# Altium PCB stesc.PcbDoc
Units mm, origin at the board's own origin, x right, y up, seen from the top; angles counter-clockwise.
Board outline 24 x 32 mm, 6 copper layers (Top Layer, Signal Layer 1, Signal Layer 2, Signal Layer 3, Signal Layer 4, Bottom Layer), stack 1.231 mm thick; 72 components, 56 nets, 239 pads, 107 vias.
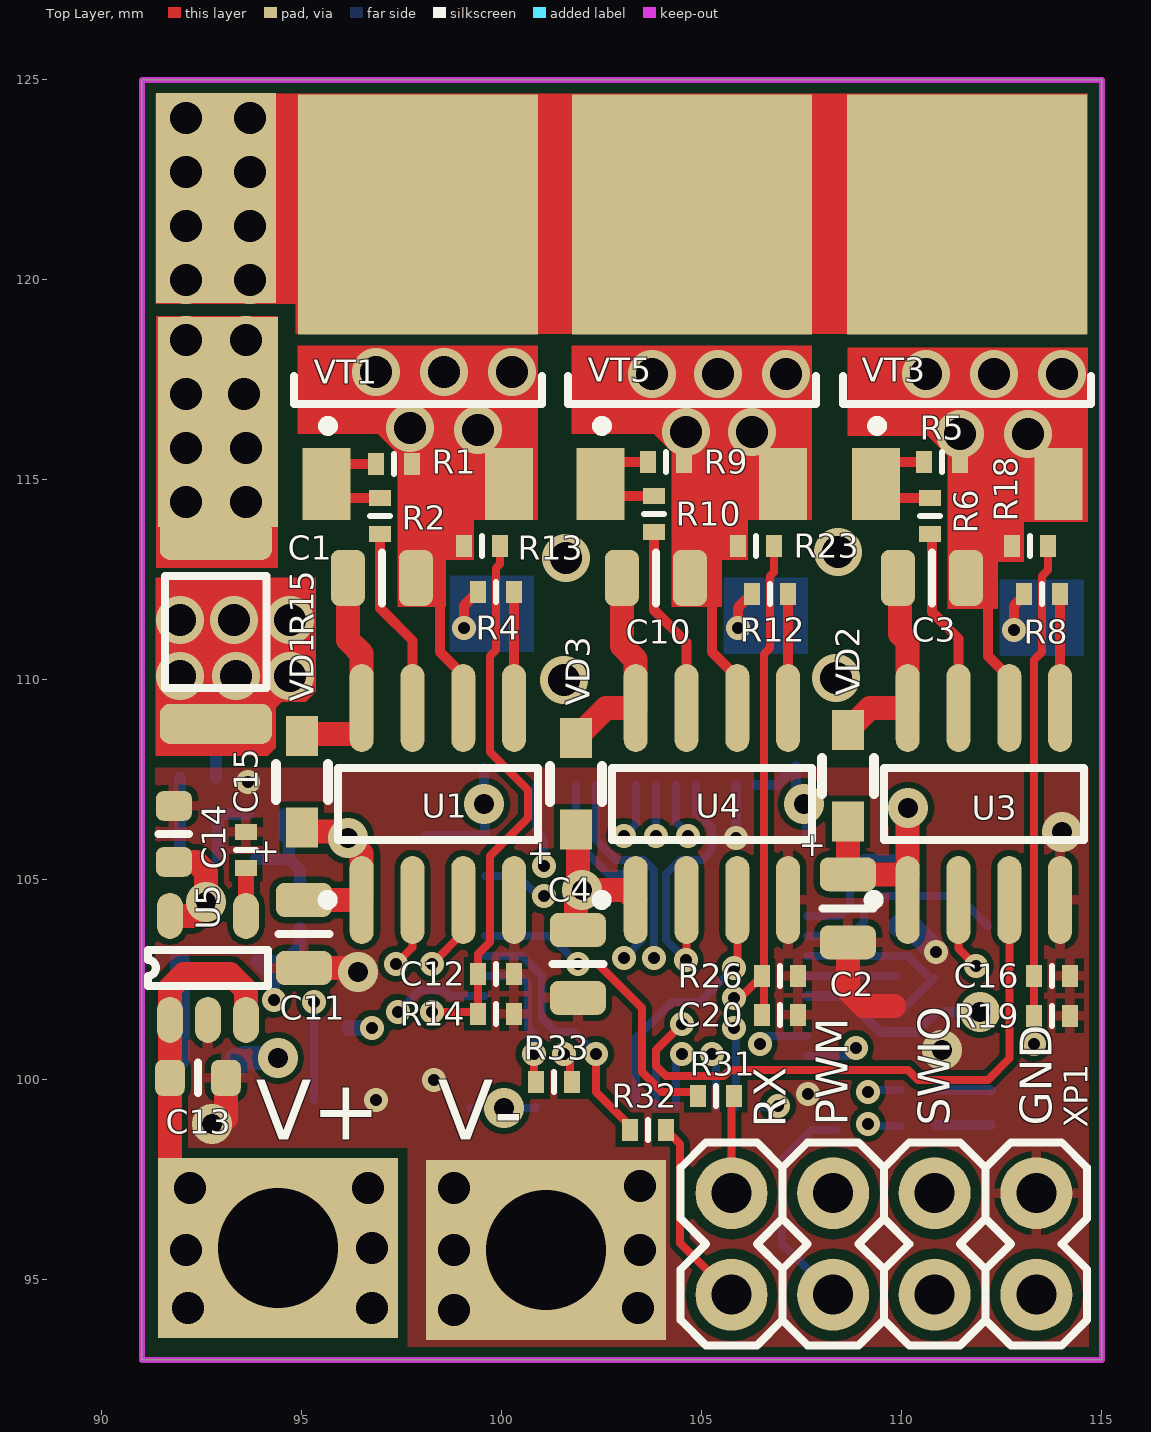
[diagram p0: Top Layer view]
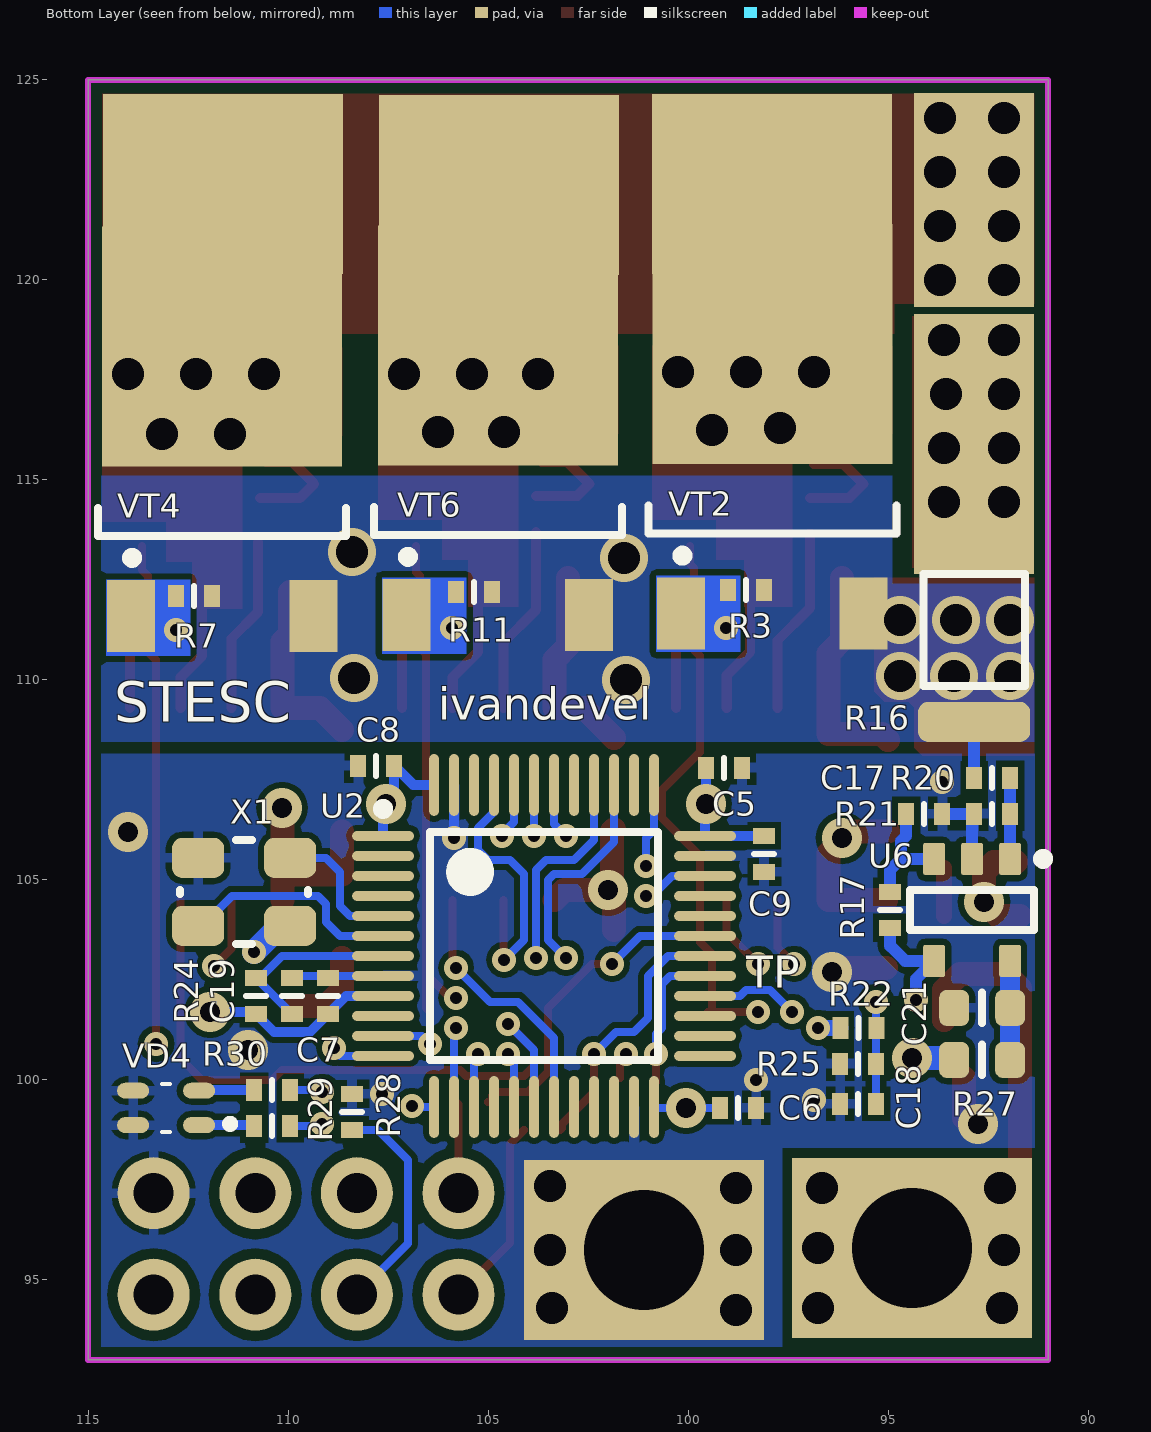
[diagram p1: Bottom Layer view, seen from below]
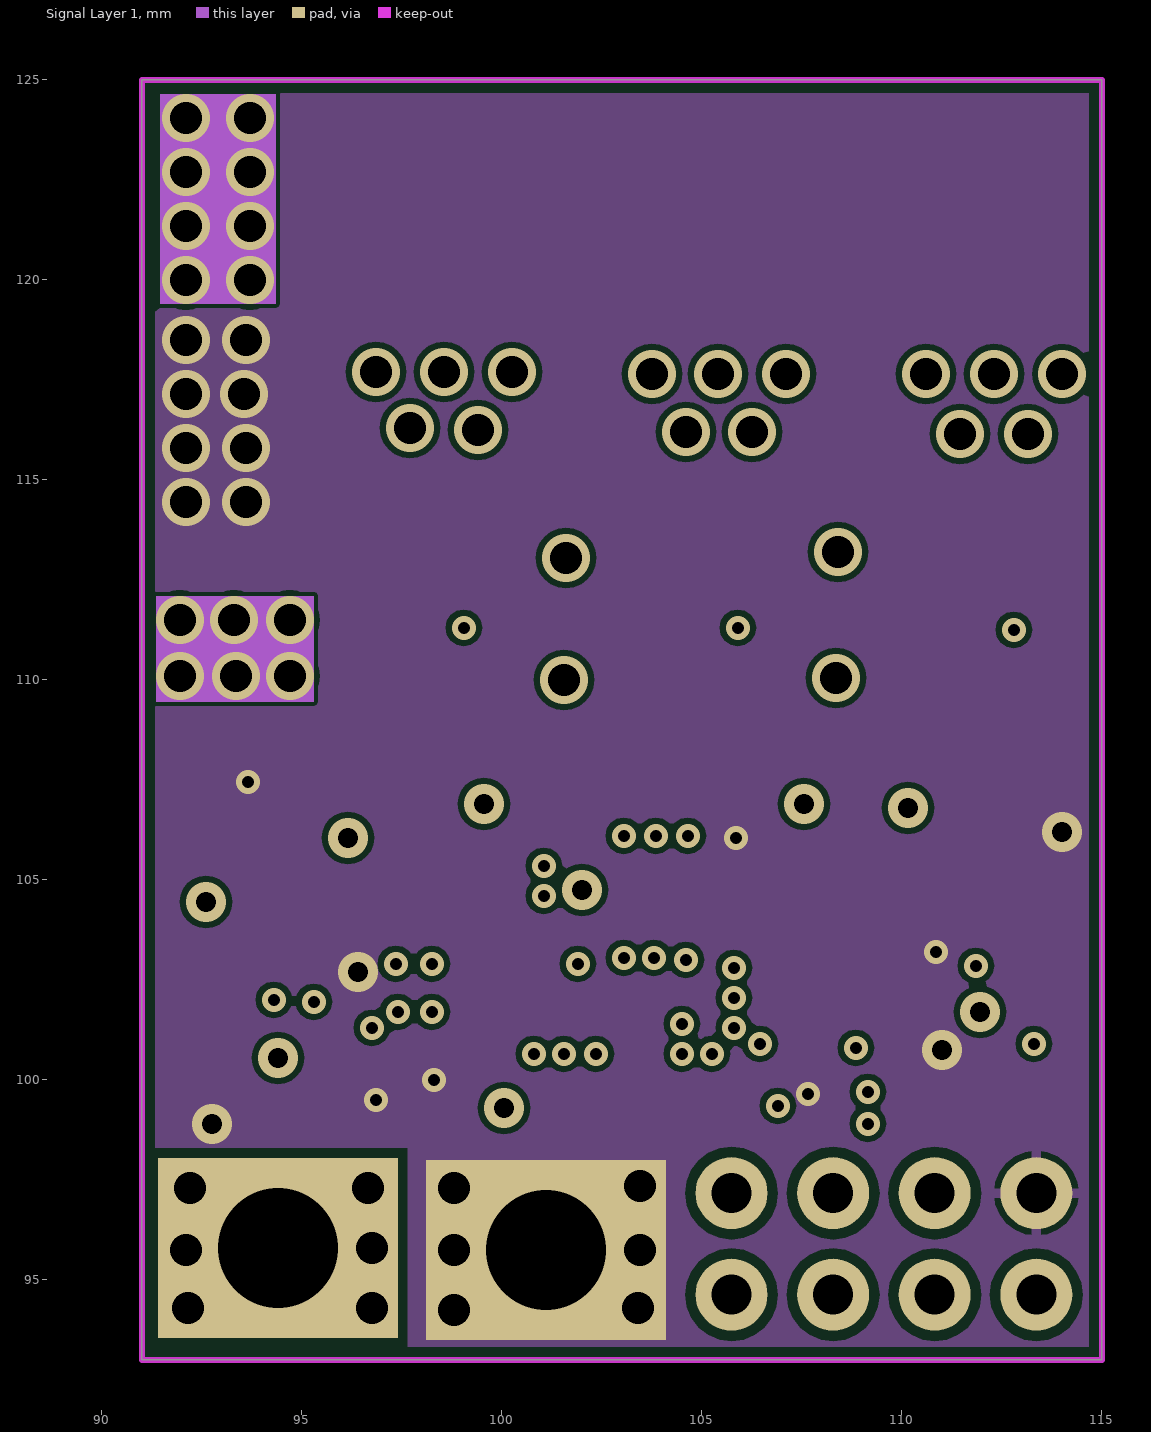
[diagram p2: Signal Layer 1]
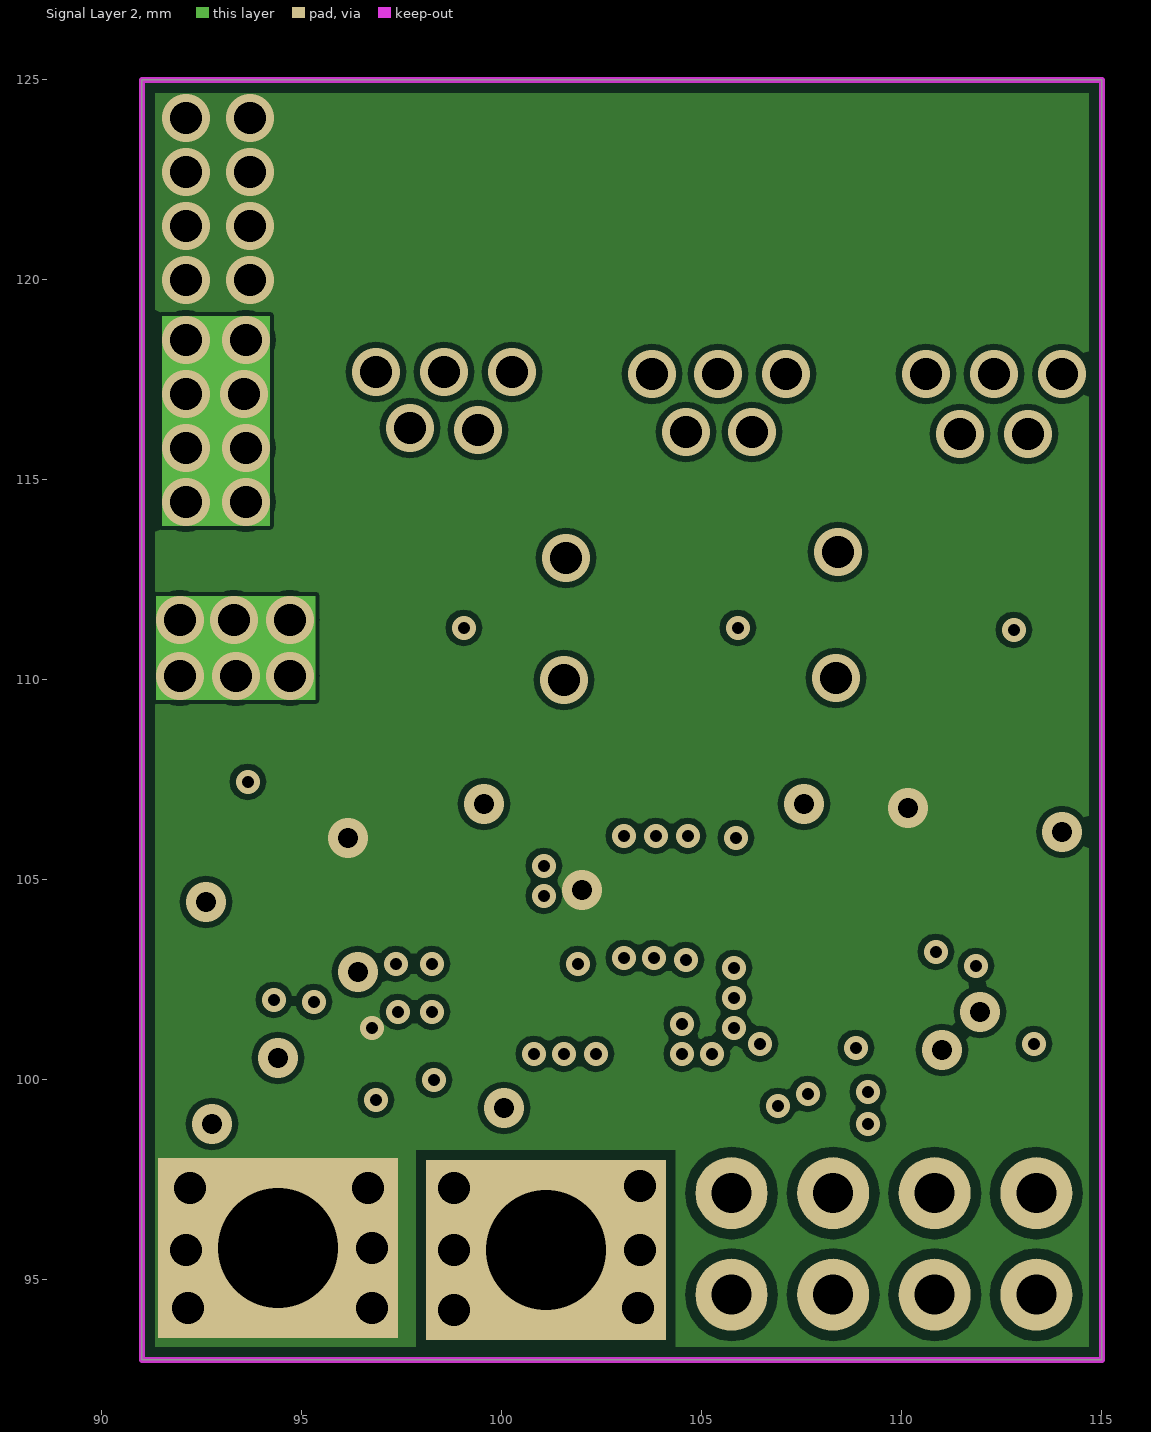
[diagram p3: Signal Layer 2]
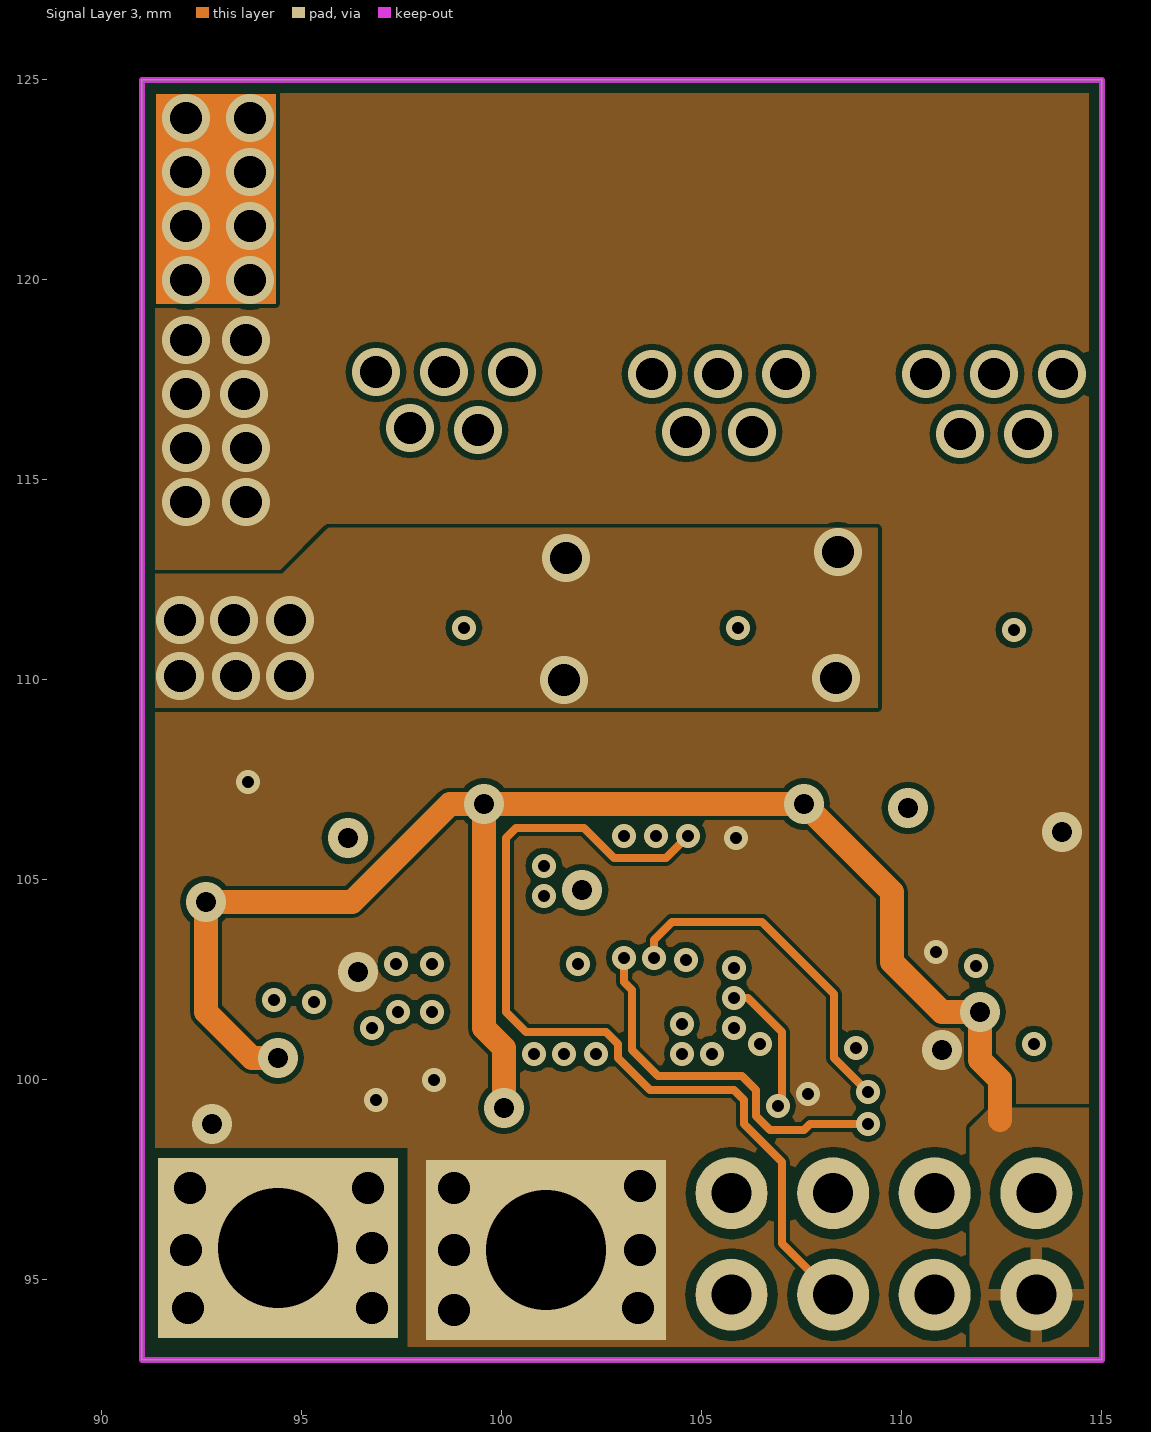
[diagram p4: Signal Layer 3]
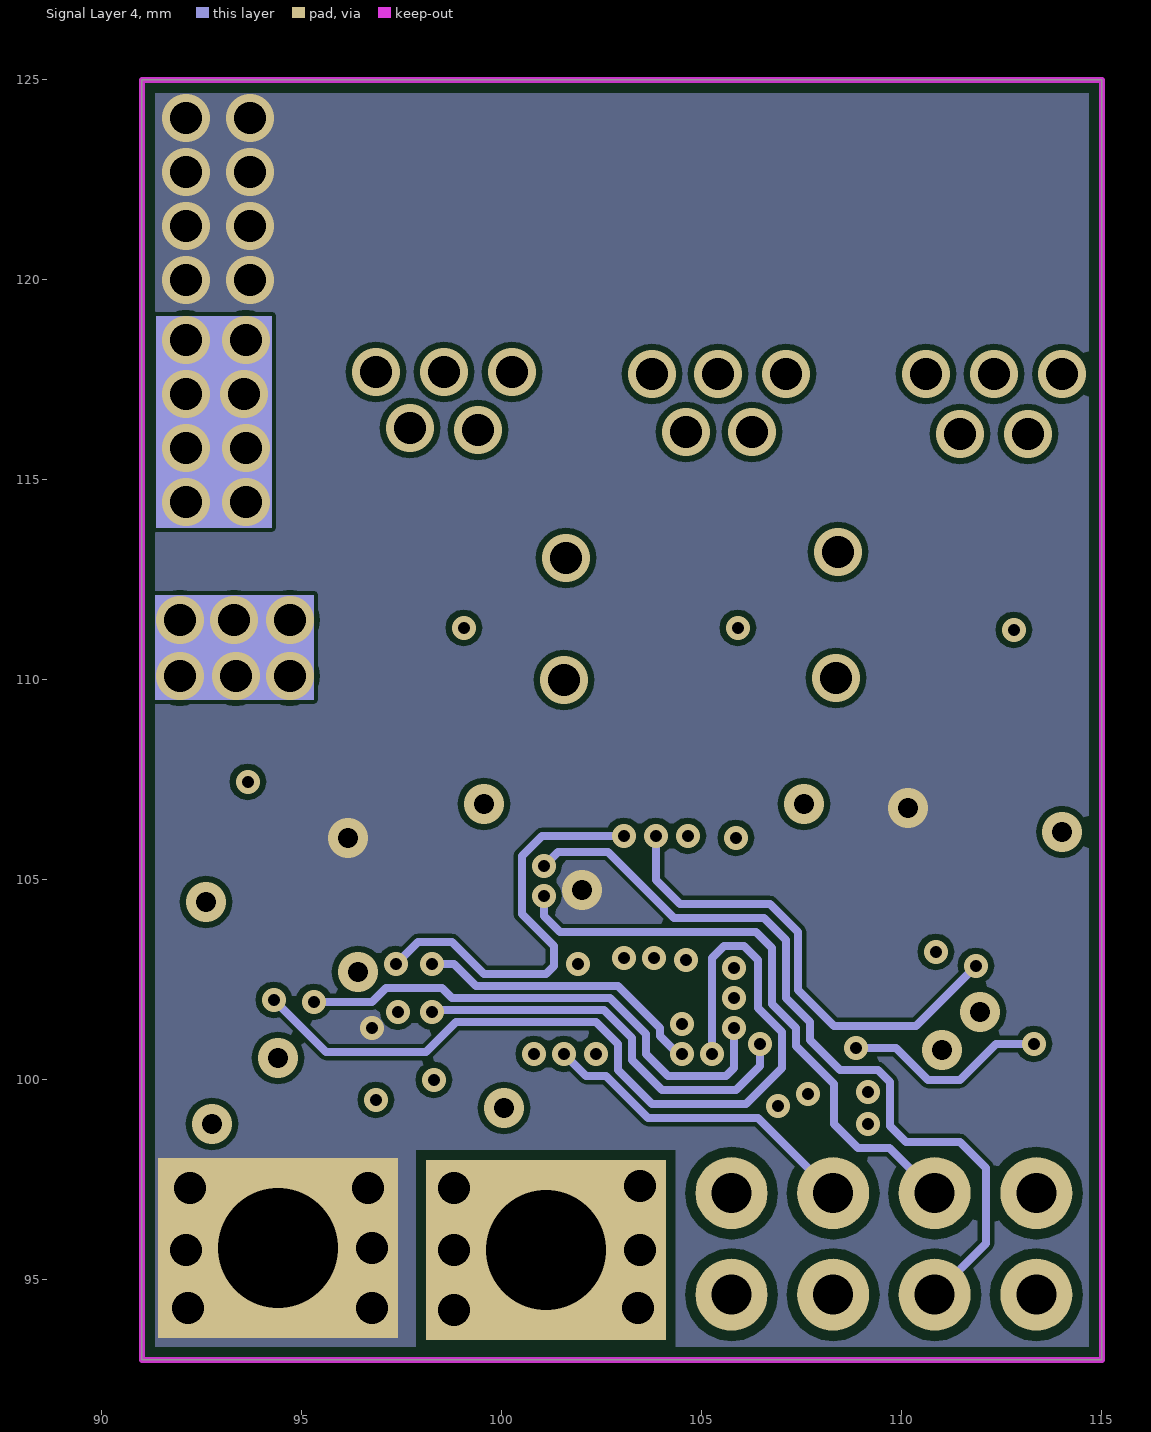
[diagram p5: Signal Layer 4]

## Layer stack, top to bottom
Top Solder: solder mask 0.0102, Solder Resist, Dk 3.5
Top Layer: signal copper 0.0356
Dielectric 1: core 0.254, FR-4, Dk 4.2
Signal Layer 1: signal copper 0.036
Dielectric 3: prepreg 0.127, Dk 4.2
Signal Layer 2: signal copper 0.036
Dielectric 4: core 0.254, Dk 4.2
Signal Layer 3: signal copper 0.036
Dielectric 5: prepreg 0.127, Dk 4.2
Signal Layer 4: signal copper 0.036
Dielectric 2: core 0.254, Dk 4.2
Bottom Layer: signal copper 0.0356
Bottom Solder: solder mask 0.0102, Solder Resist, Dk 3.5

## Board outline
91,93 91,125 115,125 115,93

## Design rules (kind name [scope] priority, off if disabled: settings)
AssemblyTestPointUsage [All] p1 off:
AssemblyTestpoint [All] p1 off: testpointundercomponent=TRUE minsize=1.016 maxsize=2.54 preferedsize=1.524 minholesize=0 maxholesize=1.016 preferedholesize=0.813 testpointgrid=0.025 usegrid=TRUE gridtolerance=0 allowsidetop=TRUE allowsidebottom=TRUE
Clearance Clearance_Holes [IsPadHoleValid] p1: gap=0.25
Clearance Clearance_Border [All vs OnLayer('Keep-Out Layer')] p2: gap=0.25
Clearance Clearance_Poly_Top [InPoly and (OnLayer('Top Layer'))] p3: gap=0.15
Clearance Clearance_Poly_Bottom [InPoly and (OnLayer('Bottom Layer'))] p4: gap=0.15
Clearance Clearance_Via_Via [IsVia vs IsVia] p5: gap=0.15
Clearance Clearance_Top [All vs OnLayer('Top Layer')] p6: gap=0.1
Clearance Clearance_Bot [All vs OnLayer('Bottom Layer')] p7: gap=0.1
Clearance Clearance_Via_Layer1 [IsVia vs OnLayer('Signal Layer 1')] p8: gap=0.15
Clearance Clearance_Via_Layer2 [IsVia vs OnLayer('Signal Layer 2')] p9: gap=0.15
Clearance Clearance_Via_Layer3 [IsVia vs OnLayer('Signal Layer 3')] p10: gap=0.15
Clearance Clearance_Via_Layer4 [IsVia vs OnLayer('Signal Layer 4')] p11: gap=0.15
Clearance Clearance_Via_Layer5 [IsVia vs OnLayer('Signal Layer 5')] p12: gap=0.15
Clearance Clearance_All [All] p13: gap=0.1
ComponentClearance ComponentClearance_LCD1_DD1_DA6 [InComponent('LCD1') vs InComponent('DD1') or InComponent('DA6')] p1: gap=0 collisioncheckmode=3 verticalgap=0 showdistances=FALSE
ComponentClearance ComponentClearance_LCD1_XS1 [InComponent('LCD1') vs InComponent('XS1')] p2: gap=0 collisioncheckmode=3 verticalgap=0 showdistances=FALSE
ComponentClearance ComponentClearance_LCD1 [InComponent('LCD1')] p3: gap=0.2 collisioncheckmode=3 verticalgap=0 showdistances=FALSE
ComponentClearance [All] p4: gap=0.2 collisioncheckmode=3 verticalgap=0.2 showdistances=TRUE
FabricationTestPointUsage [All] p1 off: valid=0 allowmultiple=FALSE
FabricationTestpoint [All] p1 off: side=3 testpointundercomponent=TRUE minsize=1.016 maxsize=2.54 preferedsize=1.524 minholesize=0 maxholesize=1.016 preferedholesize=0.813 testpointgrid=0.025 allowsidetop=TRUE allowsidebottom=TRUE usegrid=TRUE gridtolerance=0
FanoutControl Fanout_BGA [IsBGA] p1 off: bgadir=Out bgaviamode=Centered fanoutstyle=Auto fanoutdirection=Alternating viagrid=0.025 // Fanout_BGA (Default Rule)
FanoutControl Fanout_LCC [IsLCC] p2 off: bgadir=Out bgaviamode=Centered fanoutstyle=Auto fanoutdirection=Alternating viagrid=0.025 // Fanout_LCC (Default Rule)
FanoutControl Fanout_SOIC [IsSOIC] p3 off: bgadir=Out bgaviamode=Centered fanoutstyle=Auto fanoutdirection=Alternating viagrid=0.025 // Fanout_SOIC (Default Rule)
FanoutControl Fanout_Small [(CompPinCount < 5)] p4 off: bgadir=Out bgaviamode=Centered fanoutstyle=Auto fanoutdirection=OutThenIn viagrid=0.025 // Fanout_Small (Default Rule)
FanoutControl Fanout_Default [All] p5 off: bgadir=Out bgaviamode=Centered fanoutstyle=Auto fanoutdirection=Alternating viagrid=0.025 // Fanout_Default (Default Rule)
HoleSize [All] p1: absolutevalues=TRUE maxlimit=5 minlimit=0.2 maxpercent=80.000 minpercent=20.000
MinimumSolderMaskSliver [All] p1 off: minsoldermaskwidth=0.2
NetAntennae [All] p1 off: netantennaetolerance=0
PlaneClearance [All] p1: clearance=0.3
PlaneConnect PlaneConnect_1 [InNet('GND')] p1: planeconnectstyle=Direct reliefexpansion=0.5 reliefentries=4 reliefconductorwidth=0.25 reliefairgap=0.25
PlaneConnect PlaneConnect_Thermopads [(InPadClass('DD4 ThermoPads'))] p2: planeconnectstyle=Direct reliefexpansion=0.508 reliefentries=4 reliefconductorwidth=0.254 reliefairgap=0.254
PlaneConnect PlaneConnect_Via [IsVia] p3: planeconnectstyle=Direct reliefexpansion=0.508 reliefentries=4 reliefconductorwidth=0.254 reliefairgap=0.254
PlaneConnect [All] p4: planeconnectstyle=Relief reliefexpansion=0.3 reliefentries=4 reliefconductorwidth=0.3 reliefairgap=0.3
PolygonConnect PolygonConnect_6 [All vs InNet('VCC')] p1: connectstyle=Direct reliefconductorwidth=0.254 reliefentries=4 polygonreliefangle="90 Angle" airgapwidth=0.254
PolygonConnect PolygonConnect_GND [(InPadClass('GND_CLASS'))] p2: connectstyle=Direct reliefconductorwidth=0.254 reliefentries=4 polygonreliefangle="90 Angle" airgapwidth=0.254
PolygonConnect PolygonConnect_5 [All vs InNet('PGND')] p3: connectstyle=Direct reliefconductorwidth=0.254 reliefentries=4 polygonreliefangle="90 Angle" airgapwidth=0.254
PolygonConnect PolygonConnect_VIA [All vs IsVia] p4: connectstyle=Direct reliefconductorwidth=0.254 reliefentries=4 polygonreliefangle="90 Angle" airgapwidth=0.254
PolygonConnect PolygonConnect_3 [InNet('GND')] p5: connectstyle=Relief reliefconductorwidth=0.25 reliefentries=4 polygonreliefangle="90 Angle" airgapwidth=0.15
PolygonConnect PolygonConnect_4 [InNet('USB_VBUS')] p6: connectstyle=Direct reliefconductorwidth=0.254 reliefentries=4 polygonreliefangle="90 Angle" airgapwidth=0.254
PolygonConnect PolygonConnect_2 [InNet('9V_IN')] p7: connectstyle=Direct reliefconductorwidth=0.254 reliefentries=4 polygonreliefangle="90 Angle" airgapwidth=0.254
PolygonConnect PolygonConnect_1 [InNetClass('ExtraPowerLines')] p8: connectstyle=Direct reliefconductorwidth=0.254 reliefentries=4 polygonreliefangle="90 Angle" airgapwidth=0.254
PolygonConnect PolygonConnect_Thermopads_1 [(InPadClass('DD4 ThermoPads'))] p9: connectstyle=Direct reliefconductorwidth=0.254 reliefentries=4 polygonreliefangle="90 Angle" airgapwidth=0.254
PolygonConnect PolygonConnect_DCPads [InPadClass('DCPads')] p10: connectstyle=Direct reliefconductorwidth=0.254 reliefentries=4 polygonreliefangle="90 Angle" airgapwidth=0.254
PolygonConnect PolygonConnect_DCParts [All vs InComponentClass('DCParts')] p11: connectstyle=Direct reliefconductorwidth=0.254 reliefentries=4 polygonreliefangle="90 Angle" airgapwidth=0.254
PolygonConnect [All] p12: connectstyle=Relief reliefconductorwidth=0.3 reliefentries=4 polygonreliefangle="90 Angle" airgapwidth=0.3
RoutingVias [All] p1: holewidth=0.2 width=0.4 viastyle="Through Hole" minholewidth=0.2 minwidth=0.4 maxholewidth=2 maxwidth=3
SilkToSilkClearance [All] p1 off: silktosilkclearance=0
SilkToSolderMaskClearance SilkscreenOverComponentPads [IsPad] p1: minsilkscreentomaskgap=0.1 clearancetoexposedcopper=TRUE
SolderMaskExpansion [All] p1: expansion=0.102
Width [All] p1: maxlimit=5 minlimit=0.1 preferedwidth=0.2
13 further rules are at their usual default settings.

## Classes and differential pairs
pad class GND_CLASS: Free-33

## Components (designator, comment, footprint, x,y, rotation, side; value= is the part's Value field where it differs from the comment)
C1 "10uF" CAP0805R 97,112.55 r180 top
C2 "10uF" CAP0805R 108.65,104.291 r90 top
C3 "10uF" CAP0805R 110.75,112.55 r180 top
C4 "10uF" CAP0805R 101.9,102.9 r90 top
C5 "100nF" CAP0402R 99.1,107.8 r180 bottom
C6 "100nF" CAP0402R 98.75,99.3 r180 bottom
C7 "100nF" CAP0402R 109,102.1 r90 bottom
C8 "100nF" CAP0402R 107.8,107.85 r0 bottom
C9 "100nF" CAP0402R 98.1,105.65 r270 bottom
C10 "10uF" CAP0805R 103.85,112.55 r180 top
C11 "10uF" CAP0805R 95.05,103.65 r90 top
C12 "1uF" CAP0402R 99.85,102.65 r180 top
C13 "10uF" CAP0603R 92.4,100.05 r180 top
C14 "10uF" CAP0603R 91.8,106.15 r270 top
C15 "100nF" CAP0402R 93.6,105.75 r90 top
C16 "1uF" CAP0402R 113.75,102.6 r180 top
C17 "1uF" CAP0402R 92.4,106.65 r180 bottom
C18 "1uF" CAP0402R 95.75,99.4 r180 bottom
C19 "1uF" CAP0402R 109.9,102.1 r270 bottom
C20 "1uF" CAP0402R 106.95,101.623 r180 top
C21 "10uF" CAP0603R 92.65,101.8 r180 bottom
R1 "10k" RES0402R 97.3,115.4 r180 top
R2 "100" RES0402R 96.95,114.1 r90 top
R3 "10k" RES0402R 98.55,112.25 r0 bottom
R4 "100" RES0402R 99.85,112.2 r180 top
R5 "10k" RES0402R 111,115.45 r180 top
R6 "100" RES0402R 110.7,114.1 r90 top
R7 "10k" RES0402R 112.35,112.1 r0 bottom
R8 "100" RES0402R 113.5,112.15 r180 top
R9 "10k" RES0402R 104.1,115.45 r180 top
R10 "100" RES0402R 103.8,114.15 r90 top
R11 "10k" RES0402R 105.35,112.2 r0 bottom
R12 "100" RES0402R 106.7,112.15 r180 top
R13 "10k" RES0402R 99.5,113.35 r180 top
R14 "1k" RES0402R 99.85,101.65 r180 top
R15 "0R02" RES2010R 92.85,111.2 r270 top
R16 "0R02" RES2010R 92.85,111.25 r270 bottom
R17 "10k" RES0402R 94.95,104.25 r270 bottom
R18 "10k" RES0402R 113.2,113.35 r180 top
R19 "1k" RES0402R 113.75,101.6 r180 top
R20 "1k" RES0402R 92.4,107.55 r180 bottom
R21 "10k" RES0402R 94.1,106.65 r0 bottom
R22 "10k" RES0402R 95.743,101.3 r0 bottom
R23 "10k" RES0402R 106.35,113.35 r180 top
R24 "10k" RES0402R 110.8,102.1 r270 bottom
R25 "1k" RES0402R 95.75,100.4 r180 bottom
R26 "1k" RES0402R 106.95,102.6 r180 top
R27 "56" RES0603R 92.65,100.5 r180 bottom
R28 "10k" RES0402R 108.4,99.2 r270 bottom
R29 "1k" RES0402R 110.4,98.85 r0 bottom
R30 "1k" RES0402R 110.4,99.75 r0 bottom
R31 "1k" RES0402R 105.35,99.6 r180 top
R32 "1k" RES0402R 103.65,98.75 r0 top
R33 "1k" RES0402R 101.3,99.95 r180 top
U1 "IR2301S" SO-8_N 98.4,106.9 r90 top
U2 "STM32F103CBT6" STM-LQFP48_L 103.6,103.35 r180 bottom
U3 "IR2301S" SO-8_N 112.05,106.9 r90 top
U4 "IR2301S" SO-8_N 105.25,106.9 r90 top
U5 "LDS3985M28R" SOT23H15-5 92.65,102.8 r90 top
U6 "LMV321M5" DBV0005A_L 92.9,104.25 r270 bottom
VD1 "BAT20JFILM" SOD323 95,107.45 r90 top
VD2 "BAT20JFILM" SOD323 108.65,107.6 r90 top
VD3 "BAT20JFILM" SOD323 101.85,107.4 r90 top
VD4 "KPTB-1612SURKCGKC" LED1612 113.05,99.3 r0 bottom
VT1 "STD20NF06T4" DPAK 97.9,119.1 r90 top
VT2 "STD20NF06T4" DPAK 97.892,115.857 r90 bottom
VT3 "STD20NF06T4" DPAK 111.63,119.1 r90 top
VT4 "STD20NF06T4" DPAK 111.65,115.8 r90 bottom
VT5 "STD20NF06T4" DPAK 104.75,119.1 r90 top
VT6 "STD20NF06T4" DPAK 104.755,115.825 r90 bottom
X1 "24.0 MHz" 3225 111.1,104.7 r0 bottom
XP1 "PLD" PLD-08 109.55,95.9 r0 top

## Footprints (in the part's own frame and the unit in brackets; to place one, negate y for a bottom-side part, rotate by r counter-clockwise, add the part's x,y. Pads: shape width x height; smd on the part's side, far side on the other; paste and mask are expansions set on the pad)
3225 [mm] "3.2x2.5x0.8mm Crystal"
  rrect50% 1.3x1 smd: 1(-1.15,-0.85) 2(1.15,-0.85) 3(1.15,0.85) 4(-1.15,0.85)
  silkscreen extent -1.6,-1.3 1.6,1.3, body extent -1.61,-1.25 1.61,1.25, height 0.82
CAP0402R [mm] "Capacitor 0402 reflow soldering"
  rect 0.4x0.55 smd: 1(-0.45,0) 2(0.45,0)
  silkscreen extent 0,-0.25 0,0.25, body extent -0.52,-0.27 0.53,0.28, height 0.56
CAP0603R [mm] "capacitor 0603 reflow soldering"
  rrect50% 0.745x0.9 smd: 1(-0.7,0) 2(0.7,0)
  silkscreen extent 0,-0.38 0,0.38, body extent -0.8,-0.4 0.8,0.4, height 0.81
CAP0805R [mm] "capacitor 0805 reflow soldering"
  rrect50% 0.85x1.4 smd: 1(-0.85,0) 2(0.85,0)
  silkscreen extent 0,-0.64 0,0.64, body extent -1,-0.62 1,0.63, height 0.61
DBV0005A_L [mm] "SOT23, 5-Leads, Body 3.05x1.75mm, Pitch 0.95mm, IPC High Density"
  rrect18% 0.8x0.55 smd: 1(-1.275,0.95) 2(-1.275,0) 3(-1.275,-0.95) 4(1.275,-0.95) 5(1.275,0.95)
  silkscreen extent -1.4,-1.55 0.5,1.9, body extent -1.42,-1.46 1.42,1.46, height 1.08
DPAK [mm] "D-PAK, 4-Leads, Body 6.1x6mm, Pitch 2.28mm, Lead Span 9.7mm, IPC High Density"
  rect 1.8x1.2 smd: 1(-4.2,2.28) 2(-4.2,-2.28)
  rect 6x6 smd: 3(2.54,0)
  silkscreen extent -2.87,-3.1 -1.5,3.1, body extent -4.55,-3.28 5.15,3.3, height 2.32
LED1612 [mm]
  oval 0.8x0.4 smd: A1(-0.825,0.43) A2(-0.825,-0.43) K1(0.825,0.43) K2(0.825,-0.43)
  silkscreen extent -1.7,-0.6 0.1,0.6, body extent -0.8,-0.65 0.8,0.65, height 0.65
PLD-08 [mm]
  round 1.8 hole 1: 1(-3.81,-1.27) 2(-3.81,1.27) 3(-1.27,-1.27) 4(-1.27,1.27) 5(1.27,-1.27) 6(1.27,1.27) 7(3.81,-1.27) 8(3.81,1.27)
  silkscreen extent -5.08,-2.54 5.08,2.54, body extent -5.08,-2.54 5.08,2.54, height 8.45
RES0402R [mm] "resistor 0402 reflow soldering"
  rect 0.4x0.55 smd: 1(-0.45,0) 2(0.45,0)
  silkscreen extent 0,-0.25 0,0.25, body extent -0.5,-0.25 0.5,0.25, height 0.36
RES0603R [mm] "resistor 0603 reflow soldering"
  rrect50% 0.75x0.9 smd: 1(-0.7,0) 2(0.7,0)
  silkscreen extent 0,-0.38 0,0.38, body extent -0.8,-0.4 0.8,0.4, height 0.46
RES2010R [mm] "resistor 2010 reflow soldering"
  rrect50% 1x2.8 smd: 1(-2.3,0) 2(2.3,0)
  silkscreen extent -1.4,-1.27 1.4,1.27, body extent -2.5,-1.25 2.5,1.25, height 0.61
SO-8_N [mm]
  oval 2.2x0.6 smd: 1(-2.4,1.905) 2(-2.4,0.635) 3(-2.4,-0.635) 4(-2.4,-1.905) 5(2.4,-1.905) 6(2.4,-0.635) 7(2.4,0.635) 8(2.4,1.905)
  silkscreen extent -2.52,-2.5 0.9,2.88, body extent -1.95,-2.45 1.95,2.45, height 1.75
SOD323 [mm]
  rect 1x0.8 smd: A(-1.143,0) K(1.143,0)
  silkscreen extent -0.45,-0.65 0.45,0.65, body extent -1.35,-0.67 1.35,0.68, height 1.1
SOT23H15-5 [mm] "SOT23, 5-Leads, Body 2.9x1.6mm, Pitch 0.95mm, Lead Span 2.8mm, IPC High Density"
  oval 1.15x0.65 smd mask+0.1: 1(-1.3,0.95) 2(-1.3,0) 3(-1.3,-0.95) 4(1.3,-0.95) 5(1.3,0.95)
  silkscreen extent -0.45,-1.5 0.45,1.5, body extent -1.5,-1.5 1.5,1.5, height 1.3
STM-LQFP48_L [mm] "QFP, 48-Leads, Body 7x7mm, Pitch 0.5mm, IPC High Density"
  oval 1.55x0.25 smd: 1(-4.025,2.75) 2(-4.025,2.25) 3(-4.025,1.75) 4(-4.025,1.25) 5(-4.025,0.75) 6(-4.025,0.25) 7(-4.025,-0.25) 8(-4.025,-0.75) 9(-4.025,-1.25) 10(-4.025,-1.75) 11(-4.025,-2.25) 12(-4.025,-2.75) 25(4.025,-2.75) 26(4.025,-2.25) 27(4.025,-1.75) 28(4.025,-1.25) 29(4.025,-0.75) 30(4.025,-0.25) 31(4.025,0.25) 32(4.025,0.75) 33(4.025,1.25) 34(4.025,1.75) 35(4.025,2.25) 36(4.025,2.75)
  oval 0.25x1.55 smd: 13(-2.75,-4.025) 14(-2.25,-4.025) 15(-1.75,-4.025) 16(-1.25,-4.025) 17(-0.75,-4.025) 18(-0.25,-4.025) 19(0.25,-4.025) 20(0.75,-4.025) 21(1.25,-4.025) 22(1.75,-4.025) 23(2.25,-4.025) 24(2.75,-4.025) 37(2.75,4.025) 38(2.25,4.025) 39(1.75,4.025) 40(1.25,4.025) 41(0.75,4.025) 42(0.25,4.025) 43(-0.25,4.025) 44(-0.75,4.025) 45(-1.25,4.025) 46(-1.75,4.025) 47(-2.25,4.025) 48(-2.75,4.025)
  silkscreen extent -4.15,-2.85 2.85,3.55, body extent -3.5,-3.5 3.5,3.5, height 1.6

## Part data
C1 C2 C3 C4 C10 C11: library part CC0805_10UF_25V_10%_X5R
C5 C6 C7 C8 C9 C15: library part CC0402_100NF_16V_10%_X5R
C12 C16 C17 C18 C19 C20: library part CC0402_1UF_16V_10%_X5R
C13 C14 C21: library part CC0603_10UF_6.3V_20%_X5R
R1 R3 R5 R7 R9 R11 R13 R17 R18 R21 R22 R23 R24 R28: library part R0402_10K_1%_0.0625W_100PPM
R2 R4 R6 R8 R10 R12: library part R0402_100R_1%_0.1W_100PPM_50V
R14 R19 R20 R25 R26 R29 R30 R31 R32 R33: library part R0402_1K_1%_0.0625W_100PPM
R15 R16: library part R2010_0R02_1%_1W_100PPM
R27: library part R0603_56R_1%_0.1W_100PPM
U1 U3 U4: library part IR2101S, "High and Low Side Driver"
U2: library part CMP-0237-00250-3, "ARM Cortex-M3 32-bit MCU, 128 KB Flash, 20 KB Internal RAM, 37 I/Os, 48-pin LQFP, -40 to 85 degC, Tray"
U5: library part C014S0053T0000000090L0000000090
U6: library part CMP-0055-01022-3, "General Purpose, Low Voltage, Rail-to-Rail Output Operational Amplifiers, 5-pin SOT-23"
VD1 VD2 VD3: library part C004S0020T0000000030L0000000030
VD4: library part C004S0020T0000000027L0000000027
VT1 VT2 VT3 VT4 VT5 VT6: "N-Channel Enhancement Mode FET"
X1: library part C012S0075T0000000004L0000000004, "http://geyer-electronic.de/uploads/tx_userartikelfrequenz/GEYER-KX-7_01.pdf"
XP1: library part PLD-08

## Free pads (board coordinates)
  rect 6x4.5 smd far side: 0(97.9,122.4) 0(104.725,122.375) 0(111.625,122.4)
  rect 6x4.5 hole 3: 3(94.4,95.8) 33(101.1,95.75)
  rect 3x6.5 smd far side: 4(92.85,115.9)
  rect 3x5.35 smd far side: 4(92.85,122)
  rect 3x5.25 smd: 4(92.85,122.05) 4(92.9,116.45)

## Via types
v1: diameter 1.2, hole 0.8, Top Layer to Bottom Layer, tented both sides, 41 vias
v2: diameter 0.6, hole 0.3, Top Layer to Bottom Layer, tented both sides, 40 vias
v3: diameter 1, hole 0.5, Top Layer to Bottom Layer, tented both sides, 13 vias
v4: diameter 1.2, hole 0.8, Top Layer to Bottom Layer, 12 vias
v5: diameter 0.6, hole 0.3, Top Layer to Bottom Layer, 1 vias

## Nets (pads, with @x,y where several pads share a name; then routed paths per layer and width w, separated by ;. In a path a pad name is that pad's centre, name@x,y a point inside that pad or via, vN(x,y) a via of type N, cw(c..) or ccw(c..) an arc to the next point about the centre after c; other vN are vias at no path point)
A_H: U1.2 U2.42 | length 13.6
  Top Layer w0.2: v2(97.35,102.9) 97.765,103.315 U1.2
  Signal Layer 4 w0.2: v2(97.35,102.9) 97.9,103.45 98.75,103.45 99.55,102.65 101.1,102.65 101.3,102.85 101.3,103.35 100.5,104.15 100.5,105.6 101,106.1 v2(103.05,106.1)
  Bottom Layer w0.2: v2(103.05,106.1) 103.35,106.4 U2.42
A_L: U1.3 U2.17 | length 10.7
  Top Layer w0.2: v2(98.25,102.9) 99.035,103.685 U1.3
  Signal Layer 4 w0.2: v2(98.25,102.9) 98.8,102.9 99.35,102.35 102.9,102.35 103.95,101.3 103.95,101.1 104.4,100.65 v2(104.5,100.65)
  Bottom Layer w0.2: U2.17 104.35,100.6 104.4,100.65 v2(104.5,100.65)
AD_CURR: R17.2 U2.15 U6.4 | length 26.1
  Signal Layer 4 w0.2: v2(94.3,102) 95.6,100.7 98.1,100.7 98.85,101.45 102.35,101.45 102.9,100.9 102.9,100.25 103.75,99.4 106.1,99.4 107,100.3 107,101.2 106.4,101.8 106.4,103 106.05,103.35 105.55,103.35 105.25,103.05 v2(105.25,100.65)
  Bottom Layer w0.2: v2(105.25,100.65) 105.35,100.55 U2.15
  Bottom Layer w0.3: v2@94.3,102.1 94.3,102.525 U6.4 94.575,102.975 94.95,103.35 R17.2
AD_MA: C12.2 R13.1 R14.2 U2.11 | length 25.5
  Top Layer w0.2: v2(98.25,101.7) R14.2@99.4,101.7 ; R14.2 R14.2@99.4,101.7 ; R14.2@99.45,101.65 R14.2@99.45,101.7 ; R14.2@99.5,101.7 R14.2@99.45,101.7 ; R13.1 99.95,112.9 99.85,112.8 99.85,110.75 99.7,110.6 99.7,108.2 100.65,107.25 100.65,106.55 99.7,105.6 99.7,103.45 99.4,103.15 R14.2@99.4,101.7 ; R14.2@99.4,101.7 R14.2@99.45,101.7
  Signal Layer 4 w0.2: v2(98.25,101.7) 98.3,101.75 102.55,101.75 103.25,101.05 103.25,100.5 104,99.75 105.85,99.75 106.45,100.35 v2(106.45,100.9)
  Bottom Layer w0.2: v2@106.45,101 v2(106.45,100.9) 106.65,101.1 U2.11
AD_MB: C16.2 R18.1 R19.2 U2.12 | length 19.1
  Top Layer w0.2: v2(113.3,100.9) R19.2 C16.2 113.3,110.5 113.5,110.7 113.5,112.6 113.65,112.75 R18.1
  Signal Layer 4 w0.2: v2(108.85,100.8) 109.85,100.8 110.65,100 111.45,100 112.35,100.9 v2(113.3,100.9)
  Bottom Layer w0.2: U2.12 108.7,100.6 108.85,100.75 v2(108.85,100.8)
AD_MC: C20.2 R23.1 R26.2 U2.13 | length 17
  Top Layer w0.2: v2@105.7,101.95 v2(105.8,102.05) 105.85,102.05 105.9,102.1 105.95,102.05 R26.2 ; C20.2@106.5,101.75 106.55,101.8 106.55,110.65 106.7,110.8 106.7,112.6 106.8,112.7 R23.1
  Signal Layer 3 w0.2: v2(105.8,102.05) 106.15,102.05 107,101.2 107,99.45 v2(106.9,99.35)
  Bottom Layer w0.2: U2.13 106.975,99.325 106.95,99.35 v2(106.9,99.35)
B_H: U2.43 U3.2 | length 15.2
  Top Layer w0.2: U3.2 111.415,103.285 v2(111.85,102.85)
  Signal Layer 4 w0.2: v2(103.85,106.1) 103.85,105 104.45,104.4 106.7,104.4 107.4,103.7 107.4,102.25 108.3,101.35 110.35,101.35 v2(111.85,102.85)
  Bottom Layer w0.2: v2(103.85,106.1) U2.43
B_L: U2.18 U3.3 | length 17
  Top Layer w0.2: v2(104.5,101.4) 103.85,100.75 103.85,100.35 104.1,100.1 105.55,100.1 105.7,100.25 110.15,100.25 110.4,100 112.15,100 112.685,100.535 U3.3
  Bottom Layer w0.2: U2.18 103.85,100.75 v2(104.5,101.4)
BOOT0: R28.2 U2.44 XP1.3 | length 29.4
  Signal Layer 3 w0.2: v2(104.65,106.1) 104.1,105.55 102.8,105.55 102.05,106.3 100.35,106.3 100.1,106.05 100.1,101.7 100.6,101.2 102.6,101.2 102.9,100.9 102.9,100.55 103.7,99.75 105.8,99.75 106.05,99.5 106.05,98.9 107,97.95 107,95.91 XP1.3
  Bottom Layer w0.2: U2.44 104.35,106.45 104.65,106.15 v2(104.65,106.1) ; XP1.3 107,95.91 107,98 107.75,98.75 R28.2@108.35,98.75
C_H: U2.45 U4.2 | length 7.1
  Top Layer w0.2: v2(104.6,103) 104.6,102.98 104.615,102.965 U4.2
  Bottom Layer w0.2: v2(104.6,103) 104.1,103.5 104.1,105.15 104.45,105.5 105,105.5 105.25,105.75 105.25,106.3 104.85,106.7 U2.45
C_L: U2.19 U4.3 | length 6.8
  Top Layer w0.2: v2(105.8,102.8) 105.8,102.85 105.75,102.8 105.7,102.85 105.885,103.035 U4.3
  Bottom Layer w0.2: U2.19 103.35,101.05 104.25,101.95 104.95,101.95 v2(105.8,102.8)
CAN_RX: U2.32
CAN_TX: U2.33
ERR_LED: R30.1 U2.40 | length 15.1
  Signal Layer 3 w0.2: v2(103.8,103.05) 103.8,103.5 104.25,103.95 106.5,103.95 108.3,102.15 108.3,100.55 v2(109.15,99.7)
  Bottom Layer w0.2: U2.40 102.35,106 102.85,105.5 103.55,105.5 103.8,105.25 v2(103.8,103.05) ; v2(109.15,99.7) 109.15,99.5 109.4,99.75 R30.1
GND: C2.1 C4.1 C5.2 C6.2 C7.2 C8.2 C9.2 C11.1 C12.1 C13.1 C14.1 C15.2 C16.1 C17.1 C18.1 C19.1 C20.1 C21.1 pad.4@92.9,116.45 pad.4@92.85,115.9 pad.33 R14.1 R15.1 R16.1 R19.1 R21.1 R25.1 R26.1 R28.1 U1.4 U2.8 U2.23 U2.35 U2.47 U3.4 U4.4 U5.2 U6.2 VD4.K1 VD4.K2 X1.2 X1.4 XP1.8 | length 11.7
  Top Layer w0.6: v3(92.75,98.9) 92.95,98.9 93.1,99.05 C13.1 ; C11.1 96.4,102.8 v3(96.4,102.7) ; C2.1@108.65,103.05 108.65,102.25 109.05,101.85 109.8,101.85 ; v3@110.9,100.75 v3(111,100.75)
  Bottom Layer w0.2: U2.8 C19.1@109.85,102.6
  Bottom Layer w0.25: v2(105.85,106.05) U2.47
  Bottom Layer w0.3: U6.2 92.9,106.65 R21.1
  Bottom Layer w0.6: X1.4 110.2,103.85 v2(110.85,103.2)
  other v1: 92.1,114.45 93.6,114.45 92.1,115.8 93.6,115.8 92.1,117.15 93.55,117.15 92.1,118.5 93.6,118.5
  other v2: 96.85,99.5 107.65,99.65 98.3,100 93.65,107.45
  other v3: 114,106.2
  other v4: 98.8,94.25 103.4,94.3 98.8,95.75 103.45,95.75 98.8,97.3 103.45,97.35
MA: C1.1 pad.0@97.9,122.4 R1.1 R13.2 U1.6 VT1.2 VT2.3 | length 3.7
  Top Layer w0.254: C1.1 98.45,111.95 98.45,110.7 99.035,110.115 U1.6
  other v1: 99.4,116.25 97.7,116.3 96.85,117.7 98.55,117.7 100.25,117.7
MB: C3.1 pad.0@111.625,122.4 R5.1 R18.2 U3.6 VT3.2 VT4.3 | length 2.8
  Top Layer w0.254: 112.15,111.85 112.15,110.6 112.685,110.065 U3.6
  other v1: 111.45,116.15 113.15,116.15 110.6,117.65 112.3,117.65 114,117.65
MC: C10.1 pad.0@104.725,122.375 R9.1 R23.2 U4.6 VT5.2 VT6.3 | length 3.7
  Top Layer w0.254: C10.1 105.25,112 105.25,110.7 105.885,110.065 U4.6
  other v1: 104.6,116.2 106.25,116.2 103.75,117.65 105.4,117.65 107.1,117.65
NetC1_2: C1.2 U1.8 VD1.K | length 5.6
  Top Layer w0.6: VD1.K@95,108.493 95.157,108.65 96.49,108.65 96.495,108.645 U1.8 96.495,110.655 96.15,111 C1.2
NetC3_2: C3.2 U3.8 VD2.K | length 4.7
  Top Layer w0.6: VD2.K 109.207,109.3 U3.8 110.145,110.955 109.95,111.15 C3.2@109.95,112.2
NetC10_2: C10.2 U4.8 VD3.K | length 5.2
  Top Layer w0.6: VD3.K 102.607,109.3 U4.8 103.345,110.505 103,110.85 C10.2
NetC15_1: C15.1 U5.4 | length 1.2
  Top Layer w0.4: U5.4 C15.1
NetC17_2: C17.2 R20.2 U6.1 | length 2
  Bottom Layer w0.3: U6.1 R20.2
NetC21_2: C21.2 R27.2 U6.5 | length 2.5
  Bottom Layer w0.5: R27.2 C21.2 U6.5
NetR1_2: R1.2 R2.2 VT1.1 | length 2.9
  Top Layer w0.254: R1.2 96.12,115.4 VT1.1 95.97,114.55 R2.2
NetR2_1: R2.1 U1.7 | length 4.7
  Top Layer w0.254: R2.1 96.95,111.8 97.765,110.985 U1.7
NetR3_2: R3.2 R4.2 VT2.1 | length 1
  Top Layer w0.254: v2(99.05,111.3) 99.05,111.85 R4.2
NetR4_1: R4.1 U1.5 | length 2.9
  Top Layer w0.254: R4.1 100.3,109.305 U1.5
NetR5_2: R5.2 R6.2 VT3.1 | length 2.9
  Top Layer w0.254: R5.2 109.9,115.45 VT3.1 109.7,114.55 R6.2
NetR6_1: R6.1 U3.7 | length 4.4
  Top Layer w0.254: R6.1@110.75,113.45 110.75,111.7 111.415,111.035 U3.7
NetR7_2: R7.2 R8.2 VT4.1 | length 1
  Top Layer w0.254: v2(112.8,111.25) 112.8,111.85 113.05,112.1 R8.2
NetR8_1: R8.1 U3.5 | length 2.9
  Top Layer w0.254: R8.1 113.955,112.145 U3.5
NetR9_2: R9.2 R10.2 VT5.1 | length 2.9
  Top Layer w0.254: R9.2 103.02,115.45 VT5.1 102.77,114.6 R10.2
NetR10_1: R10.1 U4.7 | length 4.7
  Top Layer w0.254: R10.1 103.8,111.75 104.615,110.935 U4.7
NetR11_2: R11.2 R12.2 VT6.1 | length 1
  Top Layer w0.254: v2(105.9,111.3) 105.9,111.8 R12.2
NetR12_1: R12.1 U4.5 | length 2.9
  Top Layer w0.254: R12.1 107.15,109.305 U4.5
NetR17_1: R17.1 R21.2 U6.3 | length 2.9
  Bottom Layer w0.3: U6.3 94.675,105.525 ; R21.2 94.55,106.1 94.675,105.975 94.675,105.525 ; R17.1 94.95,105.25 94.675,105.525
NetR29_2: R29.2 VD4.A1 | length 1.4
  Bottom Layer w0.25: R29.2 110.87,98.87 VD4.A1
NetR30_2: R30.2 VD4.A2 | length 1.4
  Bottom Layer w0.25: R30.2 112.205,99.75 VD4.A2
NetR31_1: R31.1 XP1.2 | length 2.3
  Top Layer w0.2: XP1.2 105.74,99.39 R31.1@105.8,99.45
NetR32_2: R32.2 XP1.1 | length 4.8
  Top Layer w0.2: R32.2 104.45,98.4 104.45,95.92 XP1.1
NetR33_1: R33.1 XP1.4 | length 8.9
  Top Layer w0.2: v2(101.55,100.65) 101.7,100.65 R33.1@101.7,100.05
  Signal Layer 4 w0.2: v2(101.55,100.65) 102.1,100.1 102.6,100.1 103.65,99.05 106.4,99.05 XP1.4
NRST: C19.2 R24.1 U2.7 | length 4.4
  Bottom Layer w0.2: U2.7 110.15,103.1 R24.1@110.6,102.65 ; C19.2 R24.1
PGND: R3.1 R7.1 R11.1 R15.2 R16.2 R20.1 VT2.2 VT4.2 VT6.2 | length 1.4
  Bottom Layer w0.3: R20.1 R16.2
  other v1: 101.55,110 108.35,110.05 91.95,110.1 93.35,110.1 94.7,110.1 91.95,111.5 93.3,111.5 94.7,111.5 101.6,113.05 108.4,113.2
PWM_IN: R33.2 U2.29 | length 3.7
  Top Layer w0.2: R33.2@100.8,99.95 v2(100.8,100.65)
  Bottom Layer w0.2: U2.29 100.45,102.6 100.65,102.4 100.65,101.3 100.8,101.15 v2(100.8,100.65)
STAT_LED: R29.1 U2.39 | length 16
  Signal Layer 3 w0.2: v2(103.05,103.05) 103.05,102.45 103.25,102.25 103.25,100.75 103.9,100.1 106,100.1 106.35,99.75 106.35,99.1 106.7,98.75 107.55,98.75 107.7,98.9 v2(109.15,98.9)
  Bottom Layer w0.2: U2.39 101.85,105.95 102.65,105.15 103.35,105.15 103.5,105 103.5,103.5 v2(103.05,103.05) ; v2(109.15,98.9) 109.2,98.85 R29.1
SWCK: U2.37 XP1.5 | length 22
  Signal Layer 4 w0.2: v2(101.05,105.35) 101.4,105.7 102.65,105.7 104.3,104.05 106.55,104.05 107.1,103.5 107.1,102.05 107.7,101.45 107.7,101 108.45,100.25 109.4,100.25 109.7,99.95 109.7,98.85 110.1,98.45 111.45,98.45 112.1,97.8 112.1,95.91 XP1.5
  Bottom Layer w0.2: U2.37 100.85,106.25 101.05,106.05 v2(101.05,105.35)
SWIO: U2.34 XP1.6 | length 16.4
  Signal Layer 4 w0.2: v2(101.05,104.6) 101.05,104.1 101.45,103.7 106.35,103.7 106.75,103.3 106.75,101.9 107.35,101.3 107.35,100.85 108.3,99.9 108.3,98.9 108.9,98.3 109.69,98.3 XP1.6
  Bottom Layer w0.2: U2.34 100.4,105.1 v2@100.95,104.55
TP_PIN: U2.28 | length 2.5
  Bottom Layer w0.2: v5(97.4,101.7) 97.95,102.25 98.55,102.25 98.7,102.1 U2.28
UART_RX: R31.2 U2.31 | length 8
  Top Layer w0.2: v2(101.9,102.9) 102.4,102.9 103.5,101.8 103.5,100.2 104,99.7 104.8,99.7 R31.2 ; R31.2@104.9,99.45 R31.2@105,99.45
  Bottom Layer w0.2: U2.31 101.2,103.6 v2(101.9,102.9)
UART_TX: R32.1 U2.30 | length 6.7
  Top Layer w0.2: v2(102.35,100.65) 102.35,99.7 103.2,98.85 R32.1 R32.1@103.15,98.8
  Bottom Layer w0.2: U2.30 100.5,103.1 101,102.6 101,101.55 101.35,101.2 101.8,101.2 v2(102.35,100.65)
VBAT: C18.2 R22.1 R25.2 U2.14 | length 17.4
  Signal Layer 4 w0.2: v2(95.3,101.95) 96.75,101.95 97.1,102.3 98.5,102.3 98.75,102.05 102.7,102.05 103.6,101.15 103.6,100.65 104.15,100.1 105.6,100.1 105.8,100.3 v2(105.8,101.3) v2@105.75,101.25
  Bottom Layer w0.2: C18.2@95.3,99.5 R25.2 v2(95.3,101.95) ; v2@105.8,101.25 v2(105.8,101.3) ; U2.14 v2@105.85,101.25
VCC: C2.2 C4.2 C11.2 C13.2 pad.3 pad.4@92.85,122 pad.4@92.85,122.05 R22.2 U1.1 U3.1 U4.1 U5.1 U5.3 VD1.A VD2.A VD3.A VT1.3 VT3.3 VT5.3 | length 21.4
  Top Layer w0.6: pad.3@91.7,97.9 C13.2 U5.1 91.7,102.3 92.05,102.65 93.2,102.65 93.6,102.25 U5.3 ; VD1.A@95,106.207 95.943,106.207 96.495,105.655 U1.1 C11.2 ; C4.2@101.85,103.75 v3@101.85,104.75 ; VD3.A 101.9,106.207 101.9,104.85 v3(102,104.75) ; U4.1 103.095,104.75 v3(102,104.75) ; VD2.A@108.65,106.207 C2.2 U3.1@110.145,105.141 ; U3.1 U3.1@110.145,105.141 ; U3.1@110.15,105.141 U3.1@110.145,105.141 ; v3(110.15,106.8) 110.145,106.795 U3.1@110.145,105.141 ; v3@101.85,104.75 v3@101.95,104.75 ; v3@101.85,104.75 101.9,104.8 v3@101.95,104.75 ; v3@101.95,104.75 v3(102,104.75)
  Bottom Layer w0.4: R22.2 v2(96.75,101.3)
  other v1: 92.1,120 93.7,120 92.1,121.35 93.7,121.35 92.1,122.7 93.7,122.7 92.1,124.05 93.7,124.05
  other v3: 96.15,106.05
  other v4: 92.15,94.3 96.75,94.3 92.1,95.75 96.75,95.8 92.2,97.3 96.65,97.3
VDD: C5.1 C6.1 C7.1 C8.1 C9.1 C14.2 R24.2 R27.1 U2.1 U2.9 U2.24 U2.36 U2.48 U5.5 XP1.7 | length 55.9
  Top Layer w0.6: U5.5 92.25,104.1 v3(92.6,104.45) 92.6,105.2 92.35,105.45 C14.2
  Signal Layer 3 w0.6: v3(94.4,100.55) 93.75,100.55 92.6,101.7 v3(92.6,104.45) 96.25,104.45 98.7,106.9 v3(99.55,106.9) ; v3(100.05,99.3) 100.05,100.8 99.55,101.3 v3(99.55,106.9) ; 112.45,99 112.45,100 111.95,100.5 v3(111.95,101.7) 111,101.7 109.75,102.95 109.75,104.7 v3(107.55,106.9) v3(99.55,106.9)
  Bottom Layer w0.2: C6.1 v3(100.05,99.3) 100.825,99.3 U2.24
  Bottom Layer w0.25: U2.9 108.55,102.1 C7.1 109.45,101.2 110.35,101.2 R24.2
  Bottom Layer w0.254: C9.1 U2.36 99.575,106.875 v3(99.55,106.9) C5.1 ; U2.48 106.875,107.375 C8.1 107.35,106.95 107.625,106.675 U2.1 ; R24.2@111,101.7 v3(111.95,101.7)
  Bottom Layer w0.6: R27.1 93.35,100.35 93.55,100.55 v3(94.4,100.55)
XT1: U2.5 X1.1 | length 3.3
  Bottom Layer w0.2: U2.5 108.45,104.1 108.7,104.35 108.7,105.2 109.05,105.55 X1.1@109.85,105.55
XT2: U2.6 X1.3 | length 5.5
  Bottom Layer w0.2: U2.6 108.7,103.6 109.05,103.95 109.05,104.4 109.25,104.6 111.4,104.6 X1.3@112.15,103.85
pads on no net: U2.2 U2.3 U2.4 U2.10 U2.16 U2.20 U2.21 U2.22 U2.25 U2.26 U2.27 U2.38 U2.41 U2.46

## Polygon pours and split planes (outlines as drawn)
GND on Bottom Layer "GND" (solid, remove dead copper, pour order 14): 90.65,108.15 115.65,108.15 116.1,107.7 116.1,93.9 115,92.8 90.9,92.8 90.25,93.45
PGND on Bottom Layer "PGND" (solid, remove dead copper, pour order 0): 91.35,112.4 94.9,112.4 94.9,115.1 114.75,115.1 114.75,108.45 91.35,108.45
GND on Signal Layer 1 "GND" (solid, remove dead copper, pour order 2): 90.45,125.65 114.75,125.65 115.55,124.85 115.55,93.2 114.85,92.5 91.1,92.5 90.65,92.95
VCC on Signal Layer 2 "VCC" (solid, remove dead copper, pour order 4): 90.7,125.45 115,125.45 115.55,124.9 115.55,92.6 115.15,92.2 91.5,92.2 90.7,93
GND on Signal Layer 3 "GND" (solid, remove dead copper, pour order 16): 89.65,125.85 116.55,125.85 117.95,124.45 117.95,93.65 115.4,91.1 91.95,91.1 90.4,92.65
PGND on Signal Layer 3 "PGND" (solid, remove dead copper, pour order 10): 90.35,112.65 94.5,112.65 95.65,113.8 109.4,113.8 109.4,109.3 90.35,109.3
VDD on Signal Layer 3 "VDD" (solid, remove dead copper, pour order 6): 115.25,92.75 115.35,99.3 112.2,99.3 111.7,98.8 111.7,92.55
GND on Top Layer "GND" (solid, remove dead copper, pour order 8): 90.5,107.8 115.45,107.8 115.7,107.55 115.7,93.1 115,92.4 90.4,92.4 89.9,92.9
VCC on Signal Layer 4 "VCC" (solid, remove dead copper, pour order 12): 90.65,92.4 90.65,125.8 91.35,126.5 116.05,126.5 117.2,125.35 117.2,93.4 115.7,91.9

## Keep-outs
Keep-Out Layer:
  the board outline again, w0.15

## Other copper
Top Layer:
  rectangle net GND: 91.35,112.8 94.4,119.1
  region net MA: 94.9,118.35 100.9,118.35 100.9,114 99.3,114 99.3,113 98.6,113 98.6,111.825 97.4,111.825 97.4,115.65 96.9,116.15 94.9,116.15
  region net MC: 101.75,118.35 107.75,118.35 107.75,114 106.15,114 106.15,113 105.5,113 105.5,111.825 104.25,111.825 104.25,115.7 103.8,116.15 101.75,116.15
  region net MB: 108.65,118.3 114.65,118.3 114.65,113.95 113.05,113.95 113.05,112.95 112.4,112.95 112.4,111.775 111.15,111.775 111.15,115.6 110.65,116.1 108.65,116.1
  region net VCC: 91.35,124.65 114.65,124.65 114.65,118.65 94.85,118.65 94.85,119.4 91.35,119.4
  region net PGND: 91.35,112.55 95.35,112.55 95.35,109.7 95.1,109.45 94.5,109.45 94.35,109.3 94.35,108.3 94.15,108.1 91.35,108.1
Signal Layer 1:
  rectangle net PGND: 91.35,109.45 95.3,112.1
  rectangle net VCC: 91.45,119.4 94.35,124.65
Signal Layer 2:
  rectangle net GND: 91.5,113.85 94.2,119.1
  rectangle net PGND: 91.35,109.5 95.343,112.1
Signal Layer 3:
  rectangle net VCC: 91.35,119.4 94.35,124.65
Signal Layer 4:
  rectangle net PGND: 91.331,109.5 95.3,112.125
  rectangle net GND: 91.35,113.8 94.25,119.1
Bottom Layer:
  region net NetR7_2: 114.55,112.5 112.45,112.5 112.45,110.6 114.55,110.6
  region net NetR11_2: 107.65,112.55 105.55,112.55 105.55,110.65 107.65,110.65
  region net NetR3_2: 100.8,112.6 98.7,112.6 98.7,110.7 100.8,110.7

## Silkscreen, mask and mechanical layers (free items; w line width, h text height)
Top Overlay:
  text "PWM" at 108.65,98.85 h0.8 r90
  text "SWIO" at 111.2,98.85 h0.8 r90
  text "GND" at 113.75,98.85 h0.8 r90
  text "RX" at 107.1,98.8 h0.8 r90
  text "V+" at 93.85,98.5 h1.5
  text "V-" at 98.4,98.5 h1.5
Bottom Overlay:
  text "ivandevel" at 106.25,109 h0.8
  text "STESC" at 114.35,108.95 h1
  text "TP" at 98.55,102.3 h0.8

## Text inside footprints (layer, text, board x,y; h text height)
VD1: Top Overlay "+" at 94.375,105.35 h0.6 r90; Mechanical 1 "+" at 94.437,105.65 h0.6 r90
VD2: Top Overlay "+" at 108.025,105.5 h0.6 r90; Mechanical 1 "+" at 108.088,105.8 h0.6 r90
VD3: Top Overlay "+" at 101.225,105.3 h0.6 r90; Mechanical 1 "+" at 101.287,105.6 h0.6 r90